# Altium PCB 32-009PCB图（源文件格式）.PcbDoc
Units mil, origin at the board's own origin, x right, y up, seen from the top; angles counter-clockwise.
Board outline 3930 x 3915 mil, 2 copper layers (Top Layer, Bottom Layer); 6 components, 37 nets, 62 pads, 0 vias.
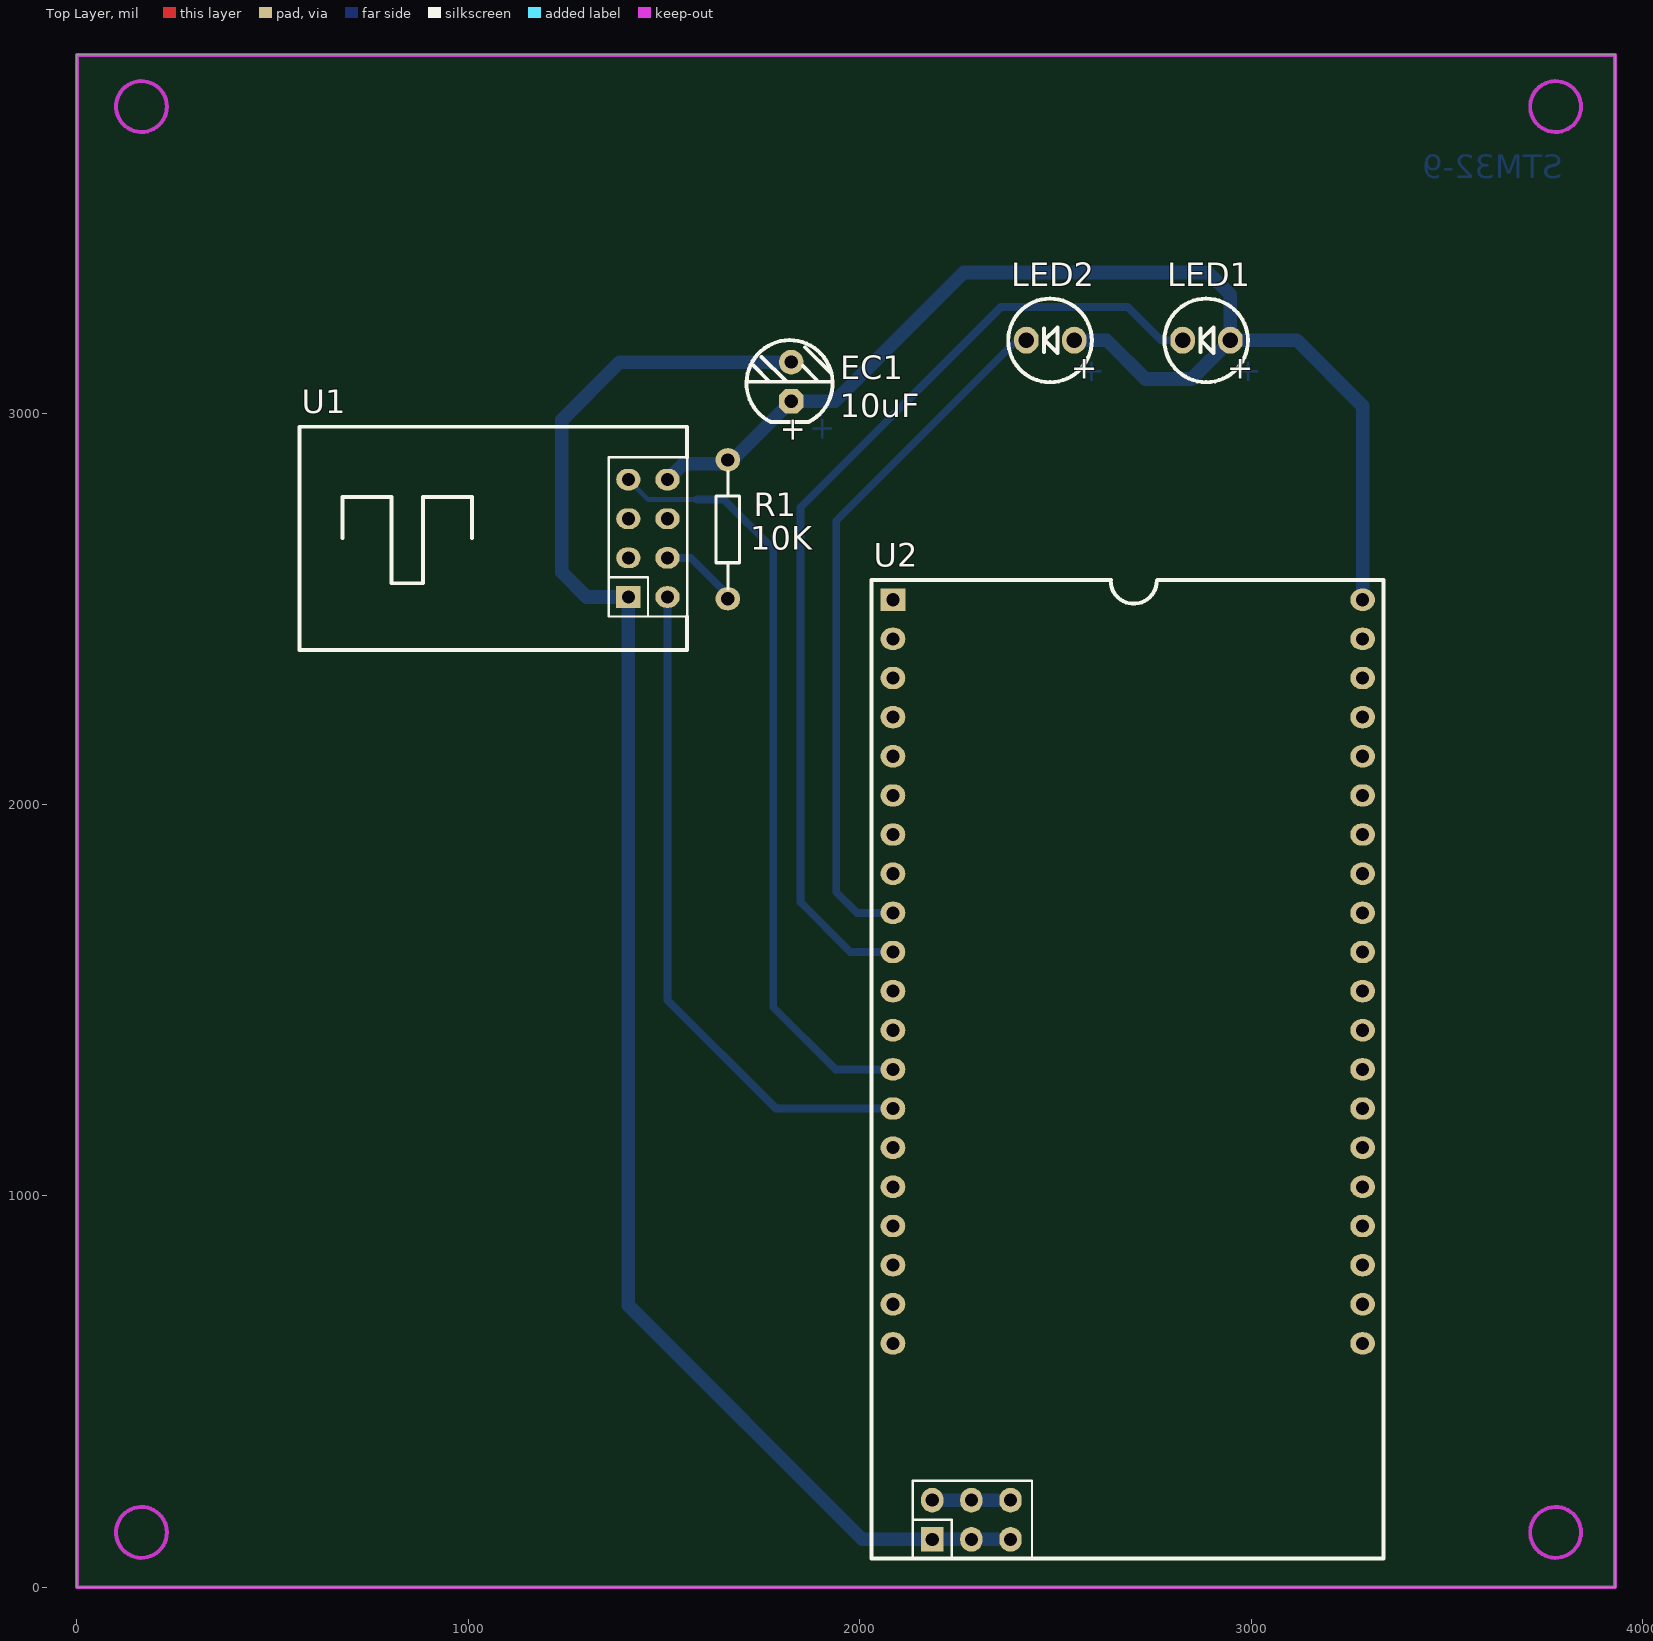
[diagram p0: Top Layer view]
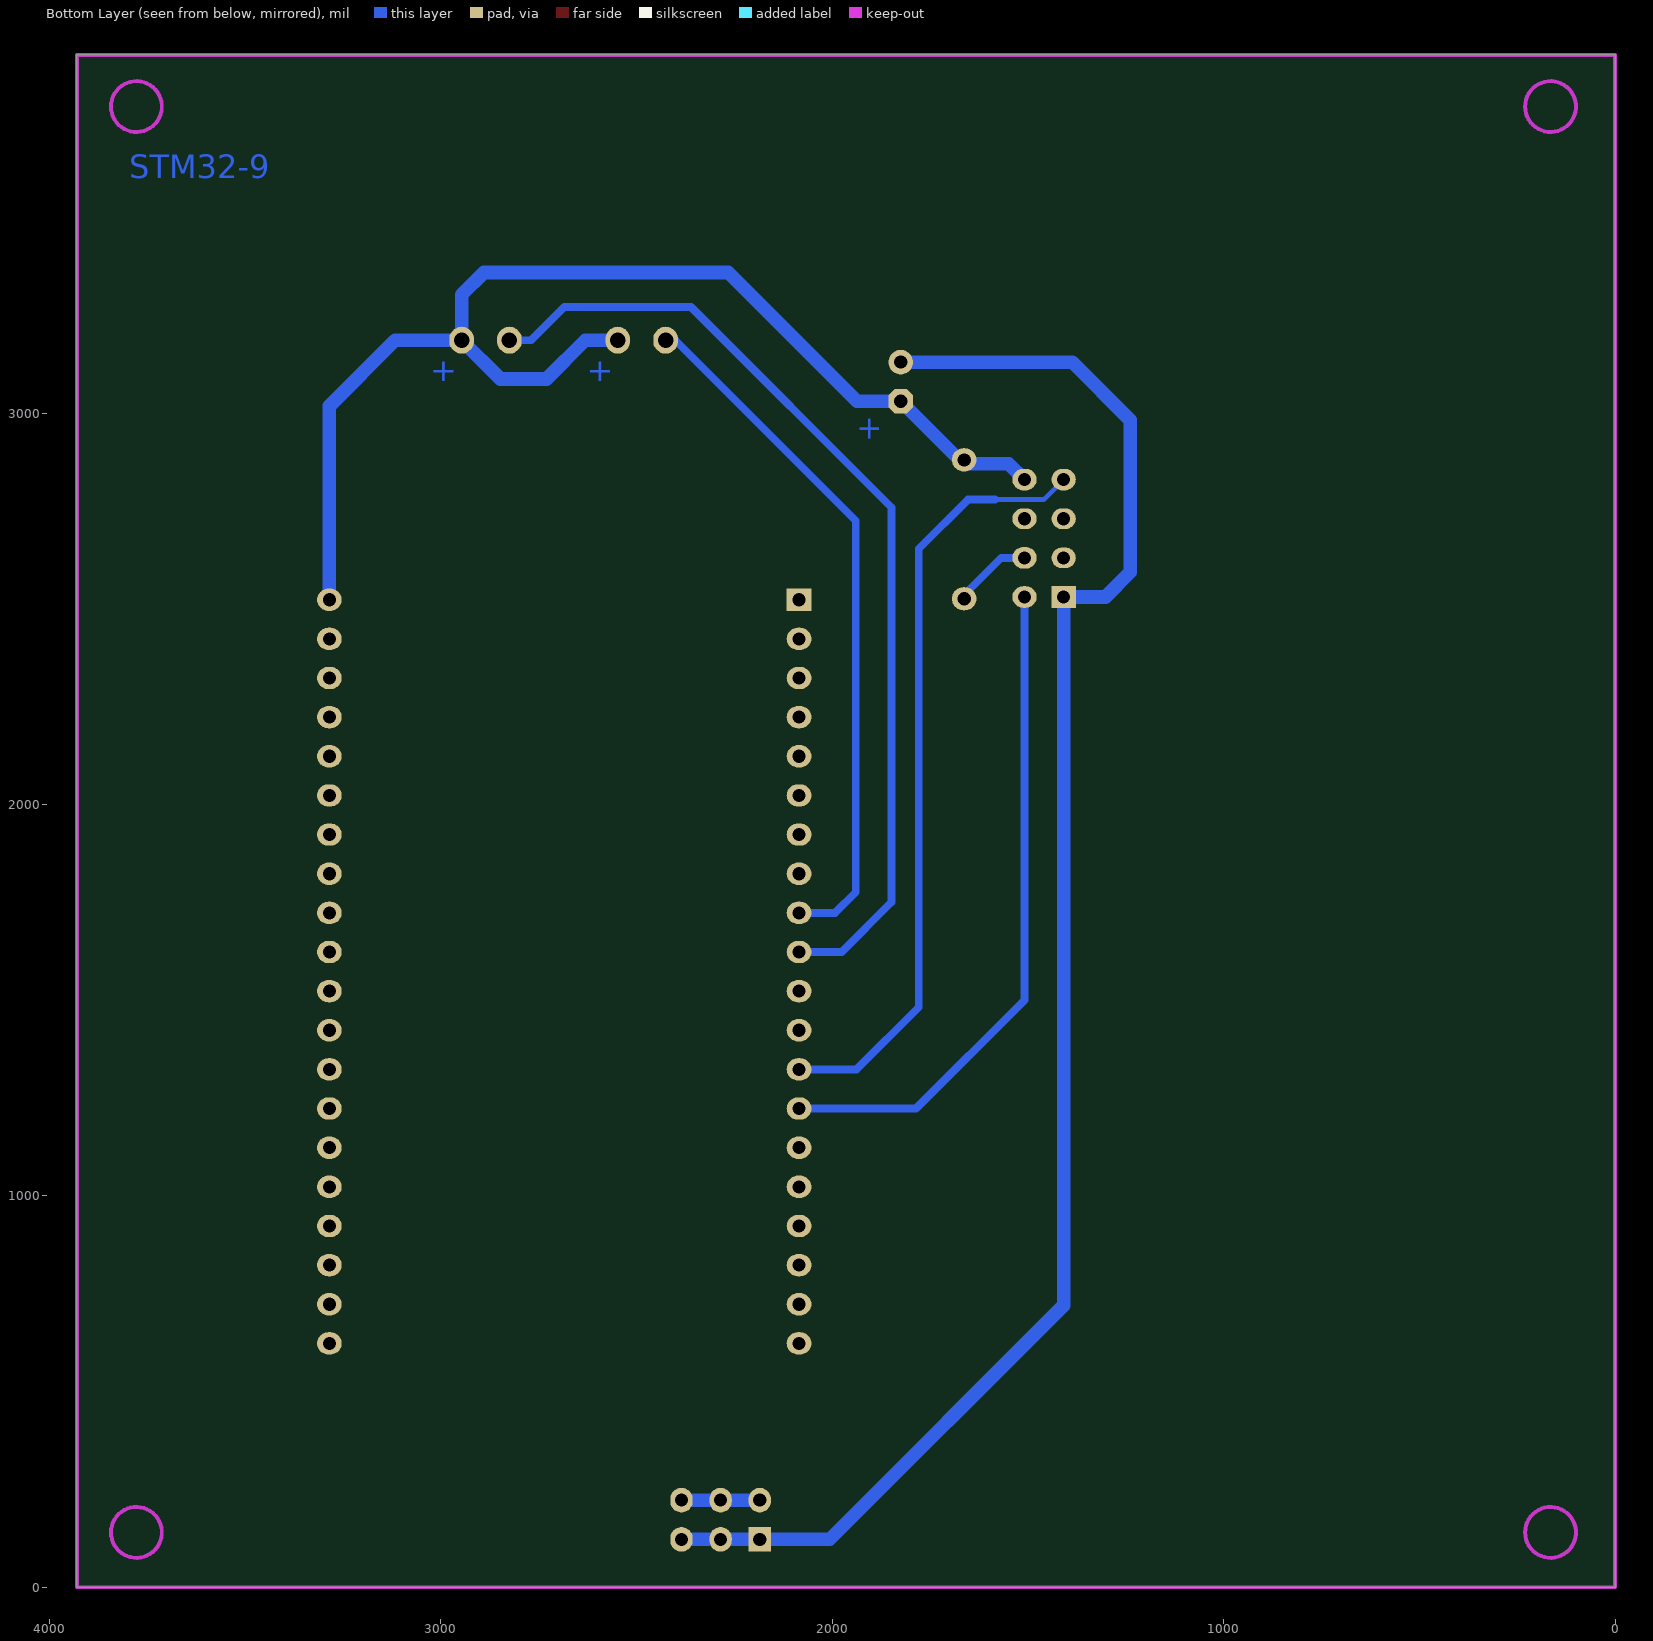
[diagram p1: Bottom Layer view, seen from below]

## Layer stack, top to bottom
Top Solder: solder mask 0.4, Solder Resist, Dk 3.5
Top Layer: signal copper 1.4
Dielectric1: dielectric 12.6, FR-4, Dk 4.8
Bottom Layer: signal copper 1.4
Bottom Solder: solder mask 0.4, Solder Resist, Dk 3.5

## Board outline
0,0 0,3915 3930,3915 3930,0

## Design rules (kind name [scope] priority, off if disabled: settings)
Clearance [All] p1: gap=12
ComponentClearance [All] p1 off: gap=10 collisioncheckmode=3 verticalgap=10 showdistances=FALSE
FabricationTestpoint [(IsPad And (OnTopLayer Or OnBottomLayer))] p1: side=3 testpointundercomponent=TRUE minsize=40 maxsize=100 preferedsize=60 minholesize=0 maxholesize=40 preferedholesize=32 testpointgrid=1 allowsidetop=TRUE allowsidebottom=TRUE usegrid=TRUE gridtolerance=0.01
Height [All] p1 off: minheight=0 maxheight=1000 prefheight=500
HoleSize [All] p1 off: absolutevalues=TRUE maxlimit=100 minlimit=1 maxpercent=80.000 minpercent=20.000
LayerPairs [All] p1 off: enforce=TRUE
PlaneClearance [All] p1 off: clearance=20
PlaneConnect [All] p1 off: planeconnectstyle=Relief reliefexpansion=20 reliefentries=4 reliefconductorwidth=10 reliefairgap=10
PolygonConnect [All] p1 off: connectstyle=Relief reliefconductorwidth=10 reliefentries=4 polygonreliefangle="90 Angle" airgapwidth=10
RoutingVias [All] p1: holewidth=28 width=50 viastyle="Through Hole" minholewidth=28 minwidth=50 maxholewidth=28 maxwidth=50
SilkToSolderMaskClearance SilkscreenOverComponentPads [IsPad] p1: minsilkscreentomaskgap=10 clearancetoexposedcopper=TRUE
SolderMaskExpansion [All] p1: expansion=4
Width [All] p1: maxlimit=100 minlimit=12 preferedwidth=20
22 further rules are at their usual default settings.

## Components (designator, comment, footprint, x,y, rotation, side; value= is the part's Value field where it differs from the comment)
EC1 "10uF" RB.1/.2 1825,3030 r90 top
LED1 "高亮" LED_D3MM12 2947,3186 r180 top
LED2 "高亮" LED_D3MM12 2548,3186 r180 top
R1 "10K" AXIAL0.3 1663,2703 r90 top
U1 "WIFI_ESP8266_MODE" WIFI_ESP8266 1559,2680 r90 top
U2 "STM32_CORE" STM32_CORE 2085,2523 r0 top

## Footprints (in the part's own frame and the unit in brackets; to place one, negate y for a bottom-side part, rotate by r counter-clockwise, add the part's x,y. Pads: shape width x height; smd on the part's side, far side on the other; paste and mask are expansions set on the pad)
AXIAL0.3 [mm]
  oval 1.5x1.6 hole 0.85: 1(-4.508,0) 2(4.508,0)
  silkscreen extent -3.87,-0.76 3.75,0.76
LED_D3MM12 [mm]
  oval 1.6x1.75 hole 1: 1(0,0) 2(3.1,0)
  silkscreen extent -1.14,-2.7 4.28,2.72
RB.1/.2 [mm]
  oct 1.6x1.6 hole 0.85: 1(0,0)
  round 1.6 hole 0.85: 2(2.54,0)
  silkscreen extent -1.35,-2.69 3.97,2.9
STM32_CORE [mm]
  rect 1.6x1.45 hole 0.85: 1(0,0)
  oval 1.6x1.45 hole 0.85: 2(0,-2.54) 3(0,-5.08) 4(0,-7.62) 5(0,-10.16) 6(0,-12.7) 7(0,-15.24) 8(0,-17.78) 9(0,-20.32) 10(0,-22.86) 11(0,-25.4) 12(0,-27.94) 13(0,-30.48) 14(0,-33.02) 15(0,-35.56) 16(0,-38.1) 17(0,-40.64) 18(0,-43.18) 19(0,-45.72) 20(0,-48.26) 21(30.48,-48.26) 22(30.48,-45.72) 23(30.48,-43.18) 24(30.48,-40.64) 25(30.48,-38.1) 26(30.48,-35.56) 27(30.48,-33.02) 28(30.48,-30.48) 29(30.48,-27.94) 30(30.48,-25.4) 31(30.48,-22.86) 32(30.48,-20.32) 33(30.48,-17.78) 34(30.48,-15.24) 35(30.48,-12.7) 36(30.48,-10.16) 37(30.48,-7.62) 38(30.48,-5.08) 39(30.48,-2.54) 40(30.48,0)
  rect 1.45x1.6 hole 0.85: 41(2.55,-60.975)
  oval 1.45x1.6 hole 0.85: 42(2.55,-58.435) 43(5.09,-60.975) 44(5.09,-58.435) 45(7.63,-60.975) 46(7.63,-58.435)
  silkscreen extent -1.4,-62.25 31.84,1.27
WIFI_ESP8266 [mm]
  rect 1.4x1.575 hole 0.85: 1(-3.81,3.81)
  oval 1.35x1.575 hole 0.85: 2(-1.27,3.81) 3(1.27,3.81) 6(1.27,1.27)
  oval 1.4x1.575 hole 0.85: 4(3.81,3.81) 5(3.81,1.27) 7(-1.27,1.27) 8(-3.81,1.27)
  silkscreen extent -7.24,0 7.24,25.15

## Part data
EC1: library part CAP_EC, "极性电容"
LED1 LED2: library part LED, "LED灯"
R1: library part RES, "电阻"
U1: "ESP8266/WIFI模块"
U2: "STM32核心板"

## Nets (pads, with @x,y where several pads share a name; then routed paths per layer and width w, separated by ;. In a path a pad name is that pad's centre, name@x,y a point inside that pad or via, vN(x,y) a via of type N, cw(c..) or ccw(c..) an arc to the next point about the centre after c; other vN are vias at no path point)
GND: EC1.2 U1.1 U2.41 U2.43 U2.45 | length 4266.3
  Bottom Layer w35: EC1.2 1387,3130 1239,2982 1239,2593 1302,2530 U1.1 1409,720 2006.6,122.4 U2.41 U2.43 U2.45
NetR1_1: R1.1 U1.7 | length 193.1
  Bottom Layer w20: U1.7 1568.5,2630 R1.1@1663,2535.5
PA0: U2.4
PA1: U2.5
PA2: U2.6
PA3: U2.7
PA4: U2.8
PA5: LED2.2 U2.9 | length 1792.9
  Bottom Layer w20: U2.9 1993,1723 1940,1776 1940,2725 2401,3186 LED2.2
PA6: LED1.2 U2.10 | length 2520.8
  Bottom Layer w20: U2.10 1976,1623 1849,1750 1849,2759 2361,3271 2685,3271 2770,3186 LED1.2
PA7: U2.11
PA8: U2.12
PA9: U1.4 U2.13 | length 1986.2
  Bottom Layer w12: U1.4 1460,2779 1584,2779
  Bottom Layer w20: 1584,2779 1653,2779 1779,2653 1779,1482 1938,1323 U2.13
PA10: U1.8 U2.14 | length 1720.7
  Bottom Layer w20: U1.8 1509,1500 1786,1223 U2.14
PA11: U2.15
PA12: U2.16
PA15: U2.17
PB0: U2.24
PB1: U2.25
PB2: U2.26
PB3: U2.27
PB4: U2.28
PB5: U2.29
PB6: U2.30
PB7: U2.31
PB8: U2.32
PB9: U2.33
PB10: U2.34
PB11: U2.35
PB12: U2.36
PB13: U2.37
PB14: U2.38
PB15: U2.39
PC13: U2.1
PC14: U2.2
PC15: U2.3
VCC_3.3V: EC1.1 LED1.1 LED2.1 R1.2 U1.5 U2.40 | length 3180.3
  Bottom Layer w35: U1.5 1549.5,2870.5 1663,2870.5 1665.5,2870.5 EC1.1 1937,3030 2266,3359 2890,3359 2947,3302 LED1.1 ; LED2.1 2631,3186 2730,3087 2848,3087 LED1.1 ; U2.40 3285,3018 3117,3186 LED1.1
VCC_5V: U2.42 U2.44 U2.46 | length 200
  Bottom Layer w35: U2.42 U2.44 U2.46
pads on no net: U1.2 U1.3 U1.6 U2.18 U2.19 U2.20 U2.21 U2.22 U2.23

## Keep-outs
Keep-Out Layer:
  circle w10: c165.04,140 r64.96
  circle w10: c165.04,3783 r64.96
  circle w10: c3778.04,3783 r64.96
  circle w10: c3778.04,140 r64.96
  lines w10: 0,0 3930,0 3930,3915 0,3915 0,0

## Other copper
Bottom Layer:
  text "STM32-9" at 3796,3600 h60

## Dimensions
-1,3907 to 6,-2 on Top Overlay
3930,3922 to 0,3915 on Top Overlay

## Text inside footprints (layer, text, board x,y; h text height)
EC1: Top Overlay "+" at 1854,2923 h60 r90; Bottom Layer "+" at 1930,2925 h60 r90
LED1: Top Overlay "+" at 3007,3138 h60 r180; Bottom Layer "+" at 3027,3131 h60 r180
LED2: Top Overlay "+" at 2608,3138 h60 r180; Bottom Layer "+" at 2628,3131 h60 r180